# Altium PCB PCB.PcbDoc
Units mm, origin at the board's own origin, x right, y up, seen from the top; angles counter-clockwise.
Board outline 115 x 98.5 mm, 2 copper layers (TOP, BOT), stack 1.636 mm thick; 45 components, 22 nets, 97 pads, 2 vias.
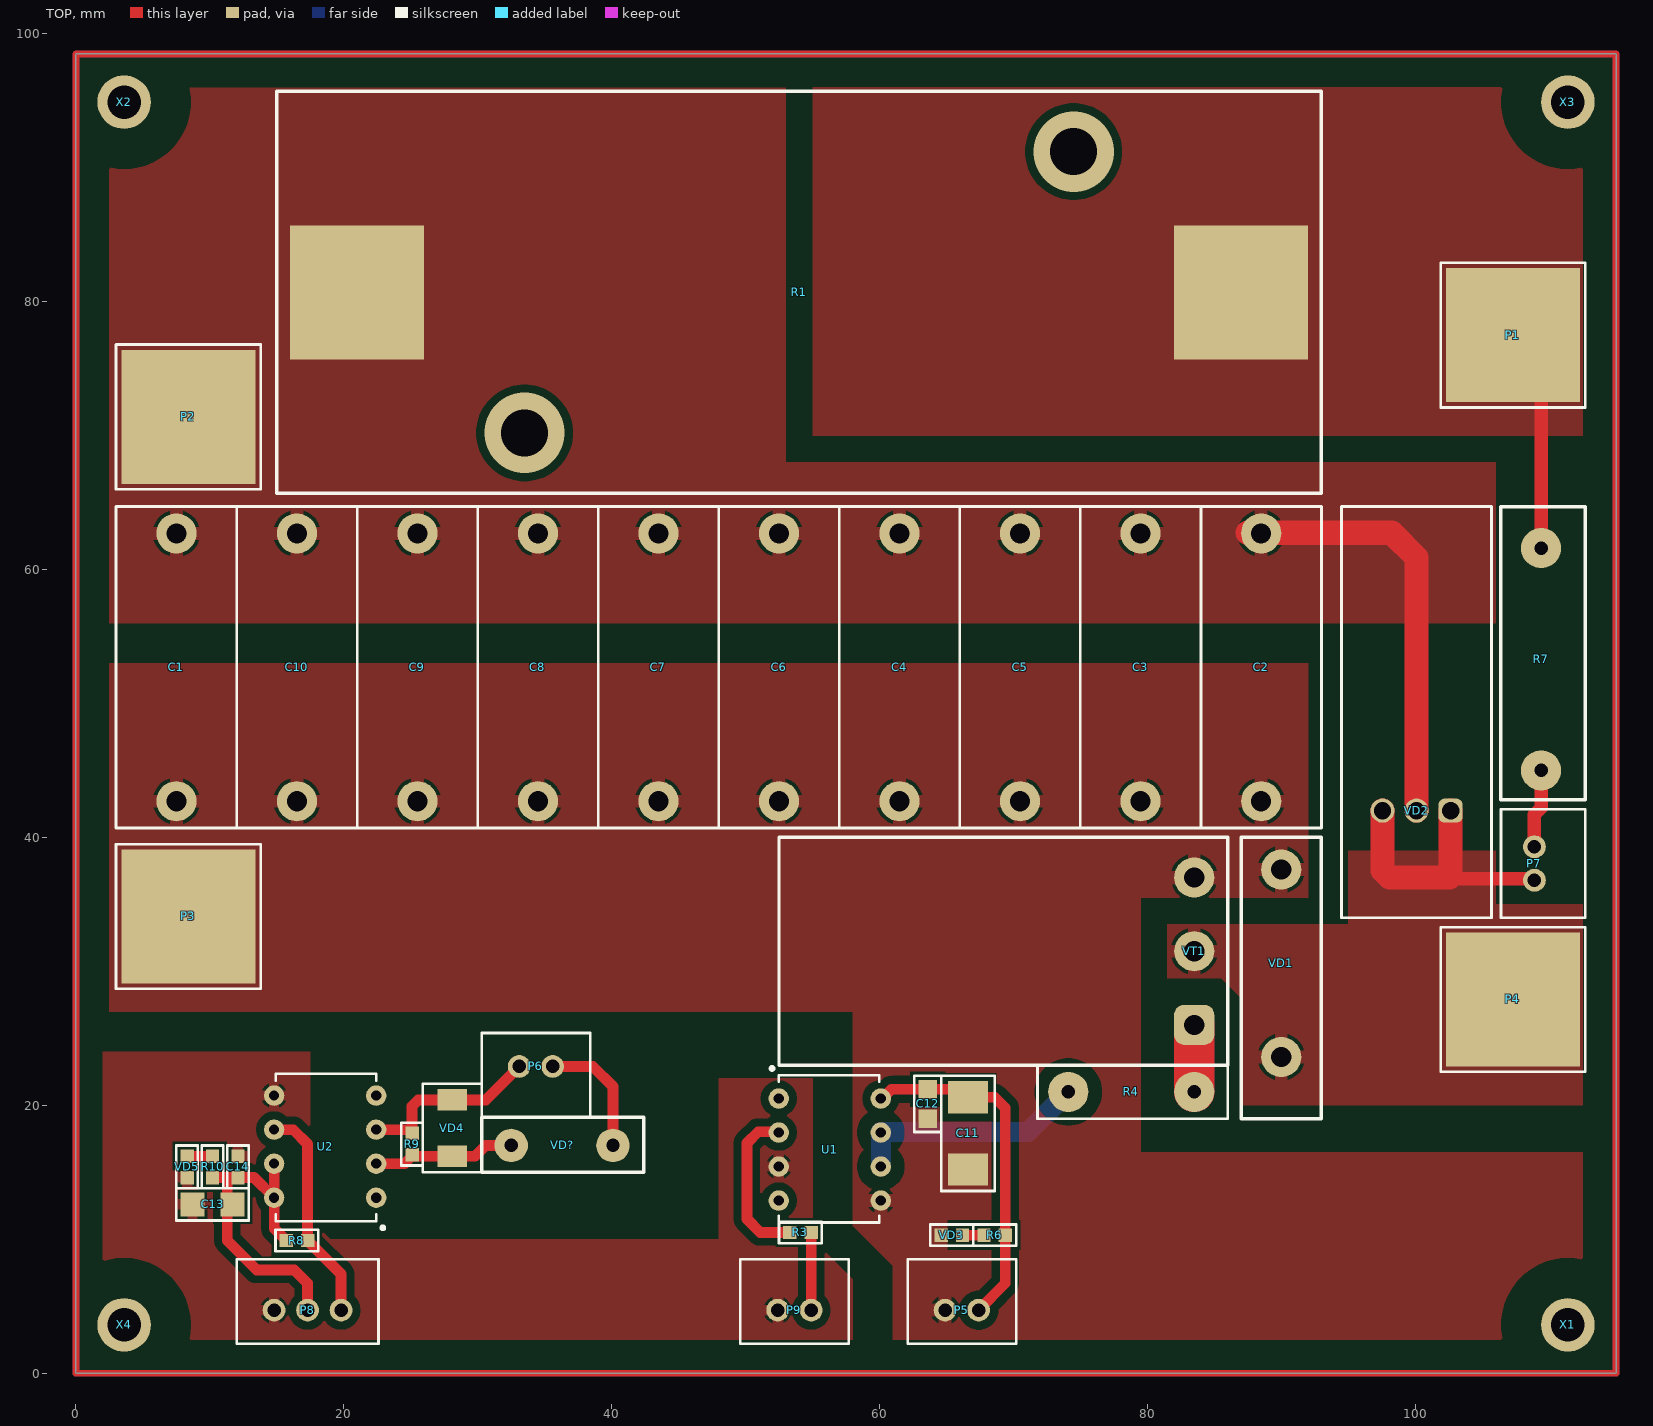
[diagram p0: TOP view]
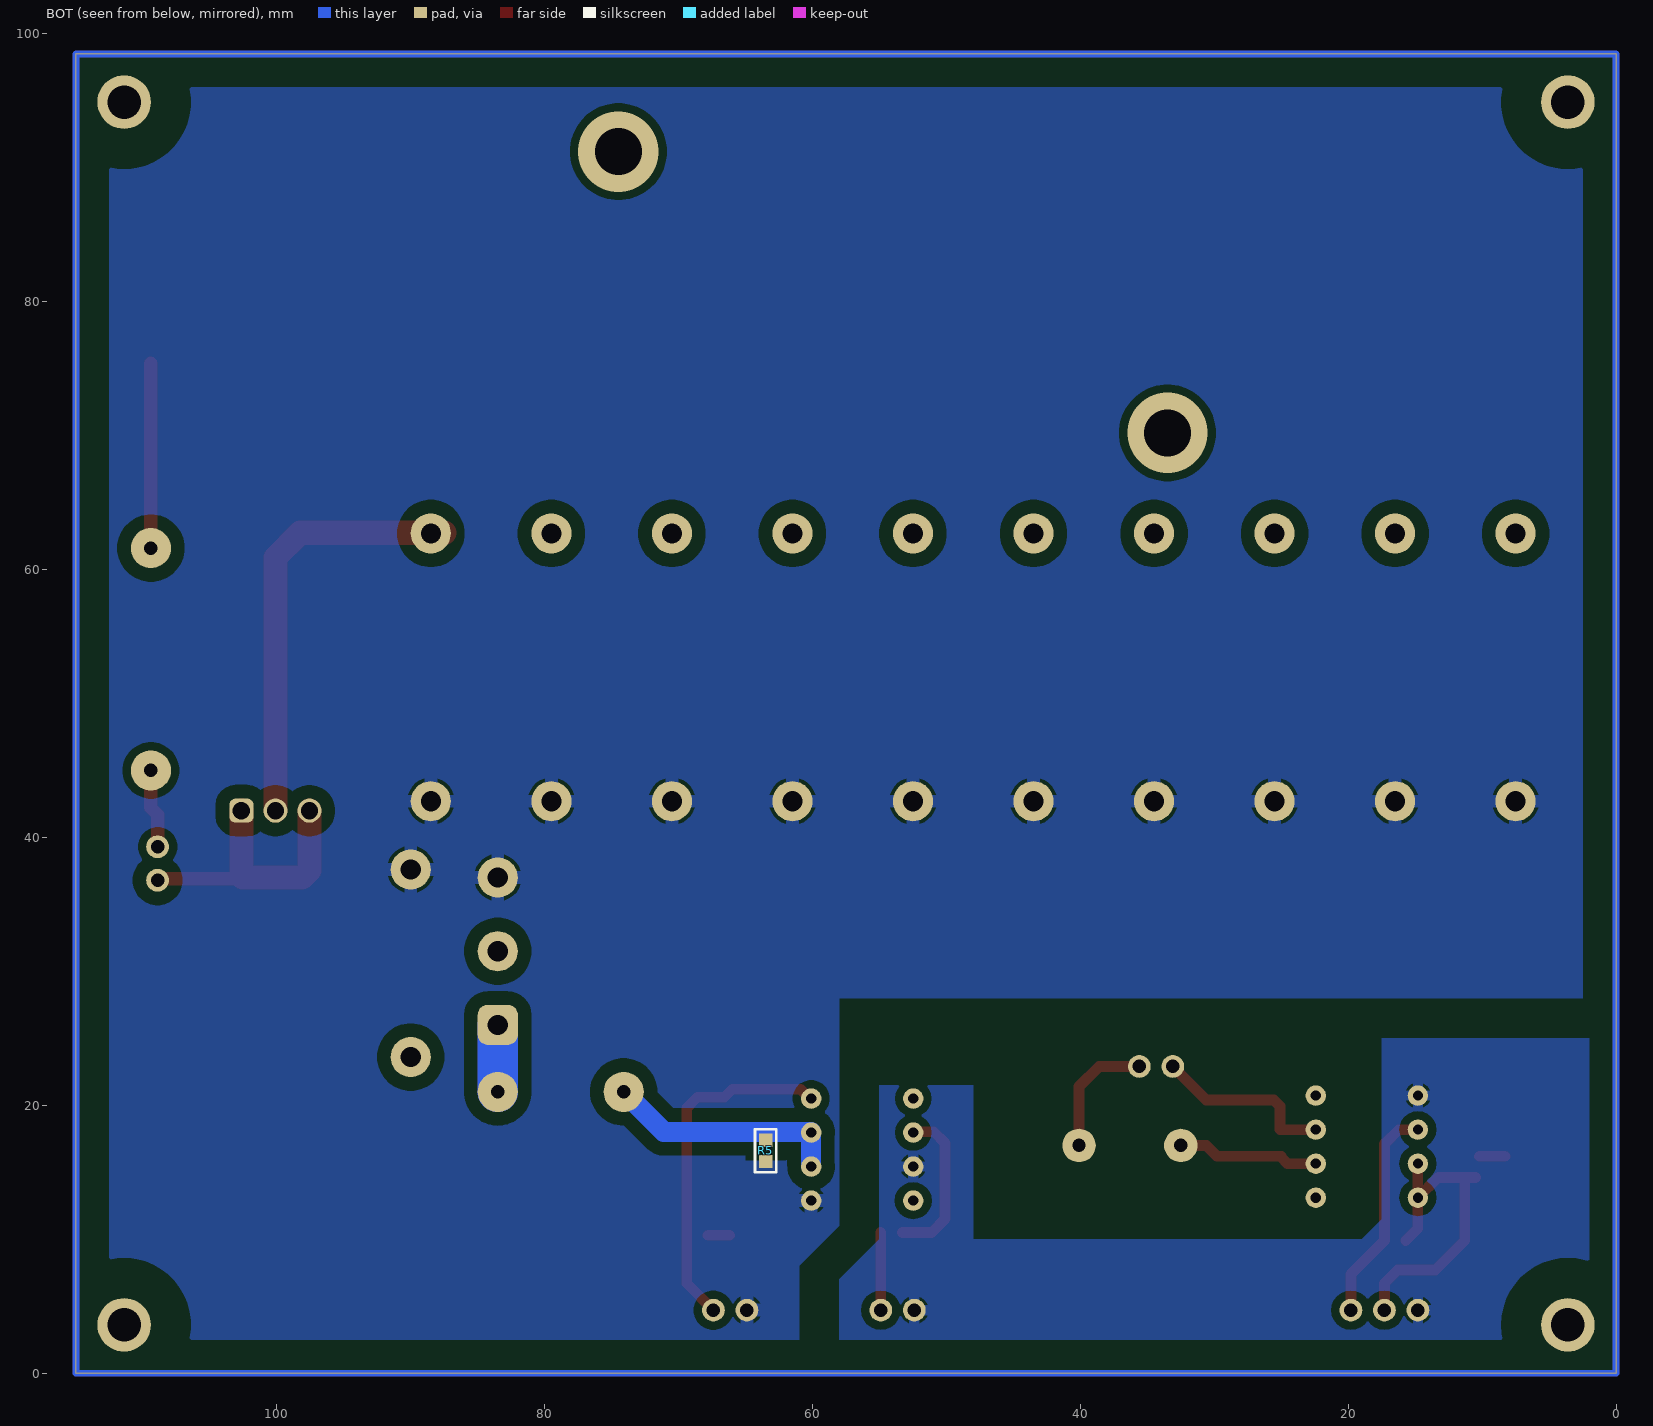
[diagram p1: BOT view, seen from below]
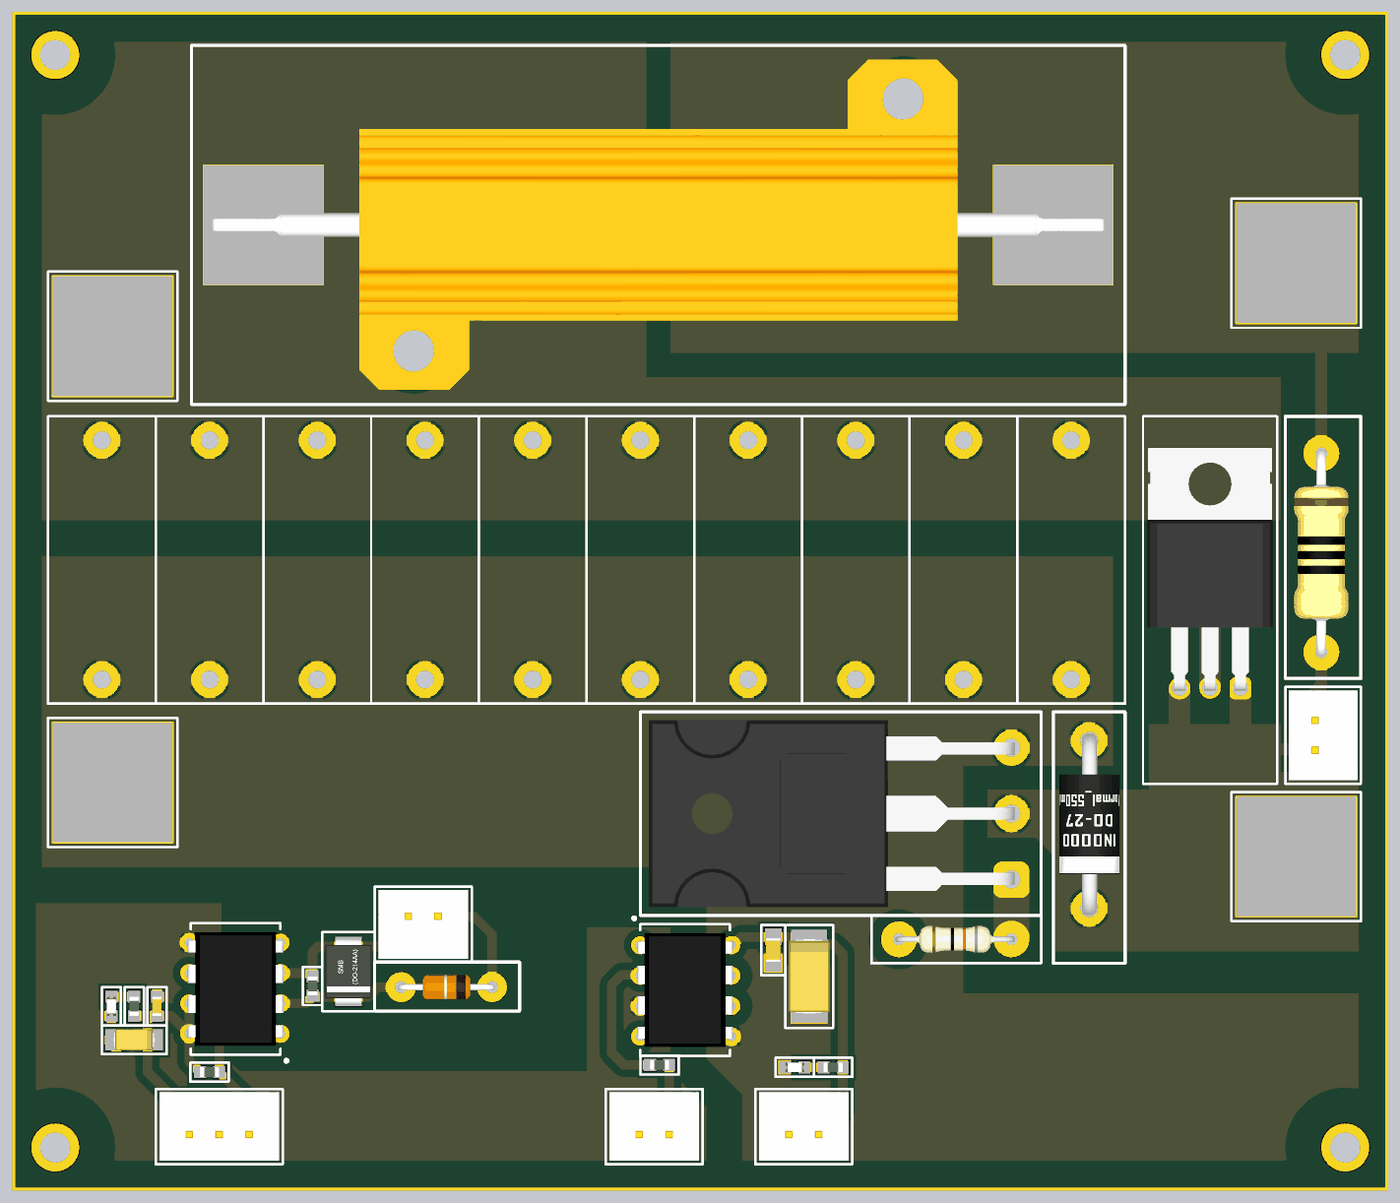
[diagram p2: 3D render of the assembled board from above, using the file's embedded part models]

## Layer stack, top to bottom
Top Solder: solder mask 0.0102, Solder Resist, Dk 3.5
TOP: signal copper 0.018
Dielectric 1: core 1.6, FR-4, Dk 4.2
BOT: signal copper 0.018
Bottom Solder: solder mask 0.0102, Solder Resist, Dk 3.5

## Board outline
0,0 0,98.5 115,98.5 115,0

## Design rules (kind name [scope] priority, off if disabled: settings)
AcuteAngle [All] p1 off: minimum=3.50000000000000E+0001 checktracksonly=FALSE
AssemblyTestPointUsage [All] p1 off:
AssemblyTestpoint [All] p1 off: testpointundercomponent=TRUE minsize=1.016 maxsize=2.54 preferedsize=1.524 minholesize=0 maxholesize=1.016 preferedholesize=0.813 testpointgrid=0.025 usegrid=TRUE gridtolerance=0 allowsidetop=TRUE allowsidebottom=TRUE
BoardOutlineClearance "BoardOutlineClearance 1" [All] p1: gap=0.25 ignorepadtopadclearanceinfootprint=FALSE except(0: Arc-SplitContinuation Track-SplitContinuation SMDPad-SplitContinuation THPad-SplitContinuation Via-SplitContinuation Fill-SplitContinuation Poly-SplitContinuation Region-SplitContinuation Text-SplitContinuation) // Milling
BoardOutlineClearance "BoardOutlineClearance 2" [All] p2: gap=0.4 ignorepadtopadclearanceinfootprint=FALSE except(0: Arc-SplitContinuation Track-SplitContinuation SMDPad-SplitContinuation THPad-SplitContinuation Via-SplitContinuation Fill-SplitContinuation Poly-SplitContinuation Region-SplitContinuation Text-SplitContinuation) // V-Cut
Clearance Mount [InNet('VCC_80V')  OR InNet('ELECTRODE+') OR InNet('ELECTRODE-') OR InNet('GND') OR InNet('NetR4_1') OR InNet('NetR4_2') OR InNet('DGND') vs InNet('MOUNT1') OR InNet('MOUNT2')  OR InNet('MOUNT3')  OR InNet('MOUNT4')] p1: gap=3 ignorepadtopadclearanceinfootprint=FALSE
Clearance HighVoltage [InNet('VCC_80V')  OR InNet('ELECTRODE+') OR InNet('ELECTRODE-') OR InNet('GND') OR InNet('NetR4_1') OR InNet('NetR4_2') OR InNet('MOUNT1') OR InNet('MOUNT2')  OR InNet('MOUNT3')  OR InNet('MOUNT4') vs InNet('VCC_80V')  OR InNet('ELECTRODE+') OR InNet('ELECTRODE-') OR InNet('GND') OR InNet('NetR4_1') OR InNet('NetR4_2') OR InNet('MOUNT1') OR InNet('MOUNT2')  OR InNet('MOUNT3')  OR InNet('MOUNT4')] p2: gap=1 ignorepadtopadclearanceinfootprint=FALSE
Clearance "Clearance-1 1 Oz" [All] p3: gap=0.6 ignorepadtopadclearanceinfootprint=FALSE // Standart
ComponentClearance [All] p1: gap=0 collisioncheckmode=3 verticalgap=0 showdistances=FALSE
DiffPairsRouting "DiffPairsRouting 1 Oz" [All] p1: maxlimit=0.254 minlimit=0.2 mostfreqgap=0.254 toplayer_minwidth=0.2 toplayer_maxwidth=0.381 toplayer_prefwidth=0.381 bottomlayer_minwidth=0.2 bottomlayer_maxwidth=0.381 bottomlayer_prefwidth=0.381 maxuncoupledlength=12.7
DiffPairsRouting "DiffPairsRouting 1/2 Oz" [All] p2: maxlimit=0.254 minlimit=0.1 mostfreqgap=0.254 toplayer_minwidth=0.1 toplayer_maxwidth=0.381 toplayer_prefwidth=0.381 bottomlayer_minwidth=0.1 bottomlayer_maxwidth=0.381 bottomlayer_prefwidth=0.381 maxuncoupledlength=12.7
FabricationTestPointUsage [All] p1 off: valid=0 allowmultiple=FALSE
FabricationTestpoint [All] p1 off: side=3 testpointundercomponent=TRUE minsize=1.016 maxsize=2.54 preferedsize=1.524 minholesize=0 maxholesize=1.016 preferedholesize=0.813 testpointgrid=0.025 allowsidetop=TRUE allowsidebottom=TRUE usegrid=TRUE gridtolerance=0
HoleSize "Minimum HoleSize" [IsPad] p1: absolutevalues=TRUE maxlimit=5.9 minlimit=0.6 maxpercent=80.000 minpercent=20.000
HoleSize "Minimum HoleSize VIA 1" [IsVia] p2: absolutevalues=TRUE maxlimit=5.9 minlimit=0.3 maxpercent=80.000 minpercent=20.000 // Standart
HoleSize "Minimum HoleSize VIA 2" [IsVia] p3: absolutevalues=TRUE maxlimit=5.9 minlimit=0.2 maxpercent=80.000 minpercent=20.000 // Advance
HoleToHoleClearance Hole2HoleClearance [All] p1: gap=0.25 allowstackedmicrovias=FALSE
MinimumAnnularRing "Minimum AR VIA Standart" [IsVia] p1: minimumring=0.15
MinimumAnnularRing "Minimum AR PAD Standart" [IsPAD] p2: minimumring=0.2
MinimumAnnularRing "Minimum AR VIA Advance" [IsVia] p3: minimumring=0.1
MinimumAnnularRing "Minimum AR PAD Advance" [IsPAD] p4: minimumring=0.15
MinimumSolderMaskSliver "SolderMask Bridge Standart" [All] p1: minsoldermaskwidth=0.15 // All Masks
MinimumSolderMaskSliver "SolderMask Bridge Advance" [All] p2: minsoldermaskwidth=0.1 // Mask LDI
PlaneClearance "PlaneClearance 1 Oz" [All] p1: clearance=0.2
PlaneClearance "PlaneClearance-1 1/2 Oz" [All] p2: clearance=0.2 // Standart
PlaneConnect "TermalConnect 2 Oz" [All] p1: planeconnectstyle=Relief reliefexpansion=0.2 reliefentries=4 reliefconductorwidth=0.3 reliefairgap=0.3 // Standart
PlaneConnect "TermalConnect-1 1 Oz" [All] p2: planeconnectstyle=Relief reliefexpansion=0.2 reliefentries=4 reliefconductorwidth=0.2 reliefairgap=0.2 // Standart
PlaneConnect "TermalConnect-1 1/2 Oz" [All] p3: planeconnectstyle=Relief reliefexpansion=0.2 reliefentries=4 reliefconductorwidth=0.2 reliefairgap=0.2 // Standart
PolygonConnect Polygons [All vs IsNamedPolygon('VCC_80V_L01_P002') OR IsNamedPolygon('ELECTRODE+_L01_P001')  OR IsNamedPolygon('GND_L01_P003') OR IsNamedPolygon('ELECTRODE-_L01_P000')  OR IsNamedPolygon('GND_L02_P006')] p1: thpad.connectstyle=Relief thpad.reliefconductorwidth=1 thpad.reliefentries=4 thpad.polygonreliefangle="90 Angle" thpad.airgapwidth=0.254 smdpad.connectstyle=Direct smdpad.reliefconductorwidth=0.254 smdpad.reliefentries=4 smdpad.polygonreliefangle="90 Angle" smdpad.airgapwidth=0.254 via.connectstyle=Relief via.reliefconductorwidth=0.254 via.reliefentries=4 via.polygonreliefangle="90 Angle" via.airgapwidth=0.254
PolygonConnect "PolygonConnect-1 1 Oz" [All] p2: thpad.connectstyle=Relief thpad.reliefconductorwidth=0.8 thpad.reliefentries=4 thpad.polygonreliefangle="90 Angle" thpad.airgapwidth=0.2 smdpad.connectstyle=Relief smdpad.reliefconductorwidth=0.8 smdpad.reliefentries=4 smdpad.polygonreliefangle="90 Angle" smdpad.airgapwidth=0.2 via.connectstyle=Direct via.reliefconductorwidth=0.254 via.reliefentries=4 via.polygonreliefangle="90 Angle" via.airgapwidth=0.254 // Standart
RoutingCorners [All] p1 off: cornerstyle=45-Degree minsetback=2.54 maxsetback=2.54
RoutingVias [All] p1: holewidth=0.3 width=0.6 viastyle="Through Hole" minholewidth=0.2 minwidth=0.4 maxholewidth=5.9 maxwidth=6.4
SilkToBoardRegionClearance [All] p1 off:
SilkToSilkClearance Silk2SilkClearance [All] p1 off: silktosilkclearance=0.15
SilkToSolderMaskClearance Silk2SolderMaskClearance [IsPad] p1 off: minsilkscreentomaskgap=0.15 clearancetoexposedcopper=TRUE
SolderMaskExpansion SolderMaskExpansion-1 [All] p1: expansion=0.05 istentingtop=FALSE // Standart
SolderMaskExpansion "SolderMaskExpansion LDI" [All] p2: expansion=0.025 istentingtop=FALSE // Advance
Width "Width 1 Oz" [All] p1: maxlimit=10 minlimit=0.15 preferedwidth=0.2 checkconnectedcopper=TRUE
15 further rules are at their usual default settings.

## Components (designator, comment, footprint, x,y, rotation, side; value= is the part's Value field where it differs from the comment)
C1 "1u 400V" К73-17 7.5,52.7 r270 top
C2 "1u 400V" К73-17 88.5,52.7 r270 top
C3 "1u 400V" К73-17 79.5,52.7 r270 top
C4 "1u 400V" К73-17 61.5,52.7 r270 top
C5 "1u 400V" К73-17 70.5,52.7 r270 top
C6 "1u 400V" К73-17 52.5,52.7 r270 top
C7 "1u 400V" К73-17 43.5,52.7 r270 top
C8 "1u 400V" К73-17 34.5,52.7 r270 top
C9 "1u 400V" К73-17 25.5,52.7 r270 top
C10 "1u 400V" К73-17 16.5,52.7 r270 top
C11 "470u 25V" TECAP_TYPE_C 66.6,17.9 r270 top
C12 "1u 25V" C_0805/2012 63.6,20.1 r270 top
C13 "470u 25V" TECAP_TYPE_A 10.2,12.6 r180 top
C14 "1u 25V" C_0603/1608 12.1,15.4 r90 top
P1 "ELECTRODE+" WIRE_SMD_10X10 107.3,77.5 r0 top
P2 "VCC_80V" WIRE_SMD_10X10 8.4,71.4 r0 top
P3 "GND" WIRE_SMD_10X10 8.4,34.1 r0 top
P4 "ELECTRODE-" WIRE_SMD_10X10 107.3,27.9 r0 top
P5 "Header 2" CWF-2 64.9,4.7 r0 top
P6 "FEEDBACK" CWF-2 35.6,22.9 r180 top
P7 "FEEDBACK" CWF-2 108.9,39.3 r270 top
P8 "Header 3" CWF-3 14.8,4.7 r0 top
P9 "Header 2" CWF-2 52.4,4.7 r0 top
R1 "1R 100W" R_50W 54,80.7 r180 top
R3 "220R" R_0603/1608 54.1,10.5 r180 top
R4 "15R 1W" AXIAL-0.25W 78.8,21 r0 top
R5 "10k" R_0603/1608 63.5,16.6 r90 bottom
R6 "3k3" R_0603/1608 68.6,10.3 r0 top
R7 "6k6 1W" AXIAL-0.4 109.4,53.3 r90 top
R8 "1k" R_0603/1608 16.5,9.9 r0 top
R9 "10k" R_0603/1608 25.1,17.1 r270 top
R10 "50R" R_0603/1608 10.2,15.4 r270 top
U1 "FOD3180" PDIP-8 52.48,20.5 r0 top
U2 "6N137" PDIP-8 22.42,13.1 r180 top
VD1 "1.5KE150A" "DO-27 / DO-201" 90,30.6 r270 top
VD2 "MBR20200CT" "TO-220 HOR" 100.1,42 r180 top
VD3 "LED" LED_0603/1608 65.4,10.3 r180 top
VD4 "1N4148" DO214AA/SMB 28.1,18.3 r270 top
VD5 "LED" LED_0603/1608 8.3,15.4 r270 top
VD? "1N4756APF (47V)" DO-35 36.3,17 r0 top
VT1 "IRFP250NPBF" TO-247_HOR 83.5,31.5 r90 top
X1 "Mounting hole" HOLE_M2_D4.0/2.5 111.4,3.6 r0 top
X2 "Mounting hole" HOLE_M2_D4.0/2.5 3.6,94.9 r0 top
X3 "Mounting hole" HOLE_M2_D4.0/2.5 111.4,94.9 r0 top
X4 "Mounting hole" HOLE_M2_D4.0/2.5 3.6,3.6 r0 top

## Footprints (in the part's own frame and the unit in brackets; to place one, negate y for a bottom-side part, rotate by r counter-clockwise, add the part's x,y. Pads: shape width x height; smd on the part's side, far side on the other; paste and mask are expansions set on the pad)
AXIAL-0.4 [mm]
  round 3 hole 1: 1(-8.3,0) 2(8.3,0)
  silkscreen extent -10.5,-3.3 11.4,3, body extent -8.65,-2.28 8.66,2.28, height 5.28
AXIAL-0.25W [mm]
  round 3 hole 1: 1(-4.7,0) 2(4.7,0)
  silkscreen extent -7,-2 7.2,2, body extent -5,-1.11 5,1.11, height 4.11
C_0603/1608 [mm] "Capacitor, SMD, 0603 (1608 metric)"
  rect 1x1 smd mask+0.1: 1(-0.8,0) 2(0.8,0)
  silkscreen extent -1.6,-0.8 1.6,0.8, body extent -0.8,-0.4 0.8,0.4, height 0.7
C_0805/2012 [mm] "Capacitor, SMD, 0805 (2012 metric)"
  rect 1.4x1.4 smd mask+0.1: 1(-1.1,0) 2(1.1,0)
  silkscreen extent -2.1,-1 2.1,1, body extent -1,-0.62 1,0.63, height 1.25
CWF-2 [mm] "Pitch 2.50"
  round 1.7 hole 1 mask+0.1: 1(0,0) 2(2.5,0)
  silkscreen extent -2.8,-2.5 5.3,3.8, body extent -2.5,-2.22 5,3.53, height 7
CWF-3 [mm] "Pitch 2.50"
  round 1.7 hole 1 mask+0.1: 1(0,0) 2(2.5,0) 3(5,0)
  silkscreen extent -2.8,-2.5 7.8,3.8, body extent -2.5,-2.22 7.5,3.53, height 7
DO214AA/SMB [mm] "SMB diode package"
  rect 1.6x2.2 smd mask+0.1: 1(-2.1,0) 2(2.1,0)
  silkscreen extent -3.3,-2.2 3.3,2.2, body extent -2.75,-1.95 2.75,1.95, height 2.45
"DO-27 / DO-201" [mm]
  round 3 hole 1.5: 1(-7,0) 2(7,0)
  silkscreen extent -9.4,-3 11.6,3, body extent -7.62,-2.5 7.62,2.55, height 7.05
DO-35 [mm]
  round 2.5 hole 1: 1(-3.8,0) 2(3.8,0)
  silkscreen extent -6,-2 6.1,2.1, body extent -4.06,-1 4.06,1, height 4
HOLE_M2_D4.0/2.5 [mm]
  round 4 hole 2.5 mask+0.1: 1(0,0)
LED_0603/1608 [mm] "LED, SMD, 0603 (1608 metric)"
  rect 1x1 smd mask+0.1: A(-0.8,0) C(0.8,0)
  silkscreen extent -1.6,-0.8 1.6,0.8, body extent -0.8,-0.4 0.8,0.4, height 0.6
PDIP-8 [mil]
  round 60 hole 30: 1(0,0) 2(0,-100) 3(0,-200) 4(0,-300) 5(300,-300) 6(300,-200) 7(300,-100) 8(300,0)
  silkscreen extent -24,-364 295,93, body extent -10,-335 305,39, height 193
R_50W [mm]
  rect 10x10 smd: 1(-33,0) 2(33,0)
  silkscreen extent -39,-15 39,15, body extent -37.3,-13.8 37.3,13.8, height 15.2
R_0603/1608 [mm] "Resistor, SMD, 0603 (1608 metric)"
  rect 1x1 smd mask+0.1: 1(-0.8,0) 2(0.8,0)
  silkscreen extent -1.6,-0.8 1.6,0.8, body extent -0.8,-0.4 0.8,0.4, height 0.45
TECAP_TYPE_A [mm] "Tantalum capacitor, Type A, SMD"
  rect 1.8x1.8 smd: 1(-1.5,0) 2(1.5,0)
  silkscreen extent -2.7,-1.2 2.7,1.2, body extent -1.7,-0.9 1.7,0.9, height 1.8
TECAP_TYPE_C [mm] "Tantalum capacitor, Type C, SMD"
  rect 2.4x3 smd: 1(-2.7,0) 2(2.7,0)
  silkscreen extent -4.3,-2 4.3,2, body extent -3.1,-1.7 3.1,1.7, height 2.8
"TO-220 HOR" [mm] "TO-220 package"
  round 1.8 hole 1.3: 1(2.54,0) 2(0,0)
  rrect50% 1.8x1.8 hole 1.3: 3(-2.54,0)
  silkscreen extent -5.6,-22.7 5.6,8, body extent -5.25,-20.05 5.25,0.2, height 4.65
TO-247_HOR [mm]
  round 3 hole 1.5: D(0,0) S(5.5,0)
  rrect50% 3x3 hole 1.5: G(-5.5,0)
  silkscreen extent -8.5,-2.5 8.5,31, body extent -7.8,-0.3 7.8,30.3, height 5
WIRE_SMD_10X10 [mm]
  rect 10x10 smd mask+0.1: 1(0,0)
  silkscreen extent -5.4,-5.4 5.4,5.4
К73-17 [mm]
  round 3 hole 1.5: 1(-10,0) 2(10,0)
  silkscreen extent -12,-4.5 12,4.5, body extent -10.55,-4 10.55,4, height 18

## Part data
C1 C2 C3 C4 C5 C6 C7 C8 C9 C10 C12 C14: library part Capacitor, "Non-polarized capacitor"
C11 C13: library part "Capacitor polar", "Polarized capacitor"
P1 P2 P3 P4: library part "Header 1", "Header, 1-Pin", LatestRevisionDate=17-Jul-2002, LatestRevisionNote="Re-released for DXP Platform.", Publisher="Altium Limited"
P5 P9: "Header, 2-Pin", LatestRevisionDate=17-Jul-2002, LatestRevisionNote="Re-released for DXP Platform.", Publisher="Altium Limited"
P6 P7: library part "Header 2", "Header, 2-Pin", LatestRevisionDate=17-Jul-2002, LatestRevisionNote="Re-released for DXP Platform.", Publisher="Altium Limited"
P8: "Header, 3-Pin", LatestRevisionDate=17-Jul-2002, LatestRevisionNote="Re-released for DXP Platform.", Publisher="Altium Limited"
R1 R3 R4 R5 R6 R7 R8 R9 R10: library part Resistor, "Resistor"
U1: "MOSFET driver"
VD1: library part TVS, "TVS"
VD2: library part "Schottky x2 C-COM", "Schottky x2 C-COM"
VD4: library part Diode, "Diode"
VD?: library part Zener, "Schottky diode"
VT1: library part "MOSFET N", "MOSFET N"

## Via types
v1: diameter 6, hole 3.5, TOP to BOT, 2 vias

## Nets (pads, with @x,y where several pads share a name; then routed paths per layer and width w, separated by ;. In a path a pad name is that pad's centre, name@x,y a point inside that pad or via, vN(x,y) a via of type N, cw(c..) or ccw(c..) an arc to the next point about the centre after c; other vN are vias at no path point)
DGND: C13.2 C14.2 P8.1 P9.1 U1.3 U2.5 VD5.C
DVCC_3V3: C13.1 C14.1 P8.2 R8.1 R10.2 U2.7 U2.8 | length 25.1
  TOP w0.8: R10.2@10.5,14.6 11.3,14.6 ; U2.7 U2.8 ; R8.1 14.8,10.8 U2.8 ; P8.2 17.3,6.7 16.3,7.7 13.5,7.7 11.3,9.9 11.3,12.6 11.3,14.6 ; 11.3,14.6 C14.1 13.3,14.6 U2.8
ELECTRODE+: P1.1 R1.1 R7.2 | length 13.8
  TOP w1: R7.2 P1.1@109.4,75.4
ELECTRODE-: P4.1 P7.2 VD1.2 VD2.1 VD2.3 VT1.D | length 20.6
  TOP w0.2: 102.56,37 103.2,37 103.3,36.9 ; P7.2@108.8,36.9 P7.2
  TOP w1: 103.3,36.9 P7.2@108.8,36.9
  TOP w1.8: VD2.1 97.56,37.54 98.1,37 102.56,37 ; 102.64,37.54 VD2.3
GATE_CTRL: P9.2 R3.1 | length 5.8
  TOP w0.8: P9.2 R3.1
GND: C1.2 C2.2 C3.2 C4.2 C5.2 C6.2 C7.2 C8.2 C9.2 C10.2 C11.2 C12.2 P3.1 P5.1 R5.1 U1.5 VD1.1 VD3.C VT1.S
MOUNT1: X1.1
MOUNT2: X2.1
MOUNT3: X3.1
MOUNT4: X4.1
NetP6_1: P6.1 VD?.2 | length 9.5
  TOP w0.8: P6.1 38.6,22.9 40.1,21.4 VD?.2
NetP6_2: P6.2 R9.1 U2.3 VD4.1 | length 13.6
  TOP w0.8: U2.3 25.08,18.18 25.1,18.2 25.1,19.931 25.569,20.4 30.6,20.4 P6.2
NetP7_1: P7.1 R7.1 | length 5.9
  TOP w1: P7.1 108.9,41.7 109.4,42.2 R7.1
NetR3_2: R3.2 U1.2 | length 12
  TOP w0.8: U1.2@52.5,18.027 50.94,18.027 50.1,17.187 50.1,11.5 51.1,10.5 R3.2
NetR4_1: R4.1 R5.2 U1.6 U1.7 | length 17.7
  BOT w1.5: U1.6@60.12,15.5 60.12,18.01 71.11,18.01 R4.1
NetR4_2: R4.2 VT1.G | length 10
  TOP w3: R4.2 VT1.G
  BOT w3: R4.2 VT1.G
NetR6_1: R6.1 VD3.A | length 1.6
  TOP w0.8: VD3.A R6.1
NetR9_2: R9.2 U2.2 VD4.2 VD?.1 | length 10.7
  TOP w0.8: U2.2 24.531,15.64 25,16.109 25,16.2 VD4.2 29.8,16.2 30.6,17 VD?.1
NetR10_1: R10.1 VD5.A | length 1.9
  TOP w0.8: VD5.A R10.1
VCC_12V: C11.1 C12.1 P5.2 R6.2 U1.8 | length 26.1
  TOP w0.8: U1.8 60.202,20.5 60.902,21.2 C12.1 66,21.2 C11.1 68.6,20.6 69.4,19.8 R6.2 69.4,6.7 P5.2
VCC_80V: C1.1 C2.1 C3.1 C4.1 C5.1 C6.1 C7.1 C8.1 C9.1 C10.1 P2.1 R1.2 VD2.2 | length 32.2
  TOP w1.8: C2.1@87.5,62.75 98.25,62.75 100.1,60.9 100.1,46.46 ; VD2.2 100.1,46.4
VOLTAGE_FB: P8.3 R8.2 U2.6 | length 16.4
  TOP w0.8: U2.6 16.22,18.18 17.3,17.1 R8.2 19.8,7.4 P8.3
pads on no net: U1.1 U1.4 U2.1 U2.4
copper on no net: | length 1067.3
  TOP w0.5: 114.9,98.5 0,98.5 0,0 115,0 115,98.5
  BOT w0.254: 0,0 0,98.5 115,98.5
  BOT w0.5: 114.9,98.5 0,98.5 0,0 115,0 115,98.5
  other v1: 33.5,70.2 74.5,91.2

## Polygon pours and split planes (outlines as drawn)
GND on TOP "GND_L01_P003" (solid, pour order 3): 2.5,53 92,53 92,35.5 79.5,35.5 79.5,16.5 112.5,16.5 112.5,2.5 61,2.5 61,8 58,11 58,27 2.5,27
DGND on TOP "TOP-DGND" (solid, pour order 22): 58,2.5 58,7 55,10 55,22 48,22 48,10 19,10 17.5,11.5 17.5,24 2,24 2,2.5
VCC_80V on TOP "VCC_80V_L01_P002" (solid, pour order 2): 2.5,96.005 53,95.991 53,68 106,68 106,56 95,56 2.5,56
ELECTRODE+ on TOP "ELECTRODE+_L01_P001" (solid, pour order 1): 55,96 112.5,96 112.5,70 94.5,70 84,70 55,70
ELECTRODE- on TOP "ELECTRODE-_L01_P000" (solid, pour order 0): 95,39 106.016,39 106.016,35 112.5,35 112.5,20 87,20 87,28 85.5,29.5 81.5,29.5 81.5,33.5 95,33.5
GND on BOT "GND_L02_P006" (solid, pour order 6): 2.5,96 112.5,96 112.5,2.5 61,2.5 61,8 58,11 58,28 20.5,28 2.5,28
DGND on BOT "BOT-DGND" (solid, pour order 21): 58,2.5 58,7 55,10 55,21.5 48,21.5 48,10 19,10 17.5,11.5 17.5,25 2,25 2,2.5

## Other copper
Multi-Layer:
  lines w0.5: 114.9,98.5 115,98.4

## Silkscreen, mask and mechanical layers (free items; w line width, h text height)
Top Solder:
  the board outline again, w0.5
Bottom Solder:
  the board outline again, w0.5
M4-BOARD:
  the board outline again, w0.254